# Altium PCB Hat_Board_PCB.PcbDoc (part 1 of 2)
Units mm, origin at the board's own origin, x right, y up, seen from the top; angles counter-clockwise.
Board outline 64 x 85 mm, 4 copper layers (Top Side, Ground Plane, Power Plane, Bottom Side), stack 0.844 mm thick; 133 components, 86 nets, 419 pads, 122 vias.
Unrouted connection lines stored in the file: 4.
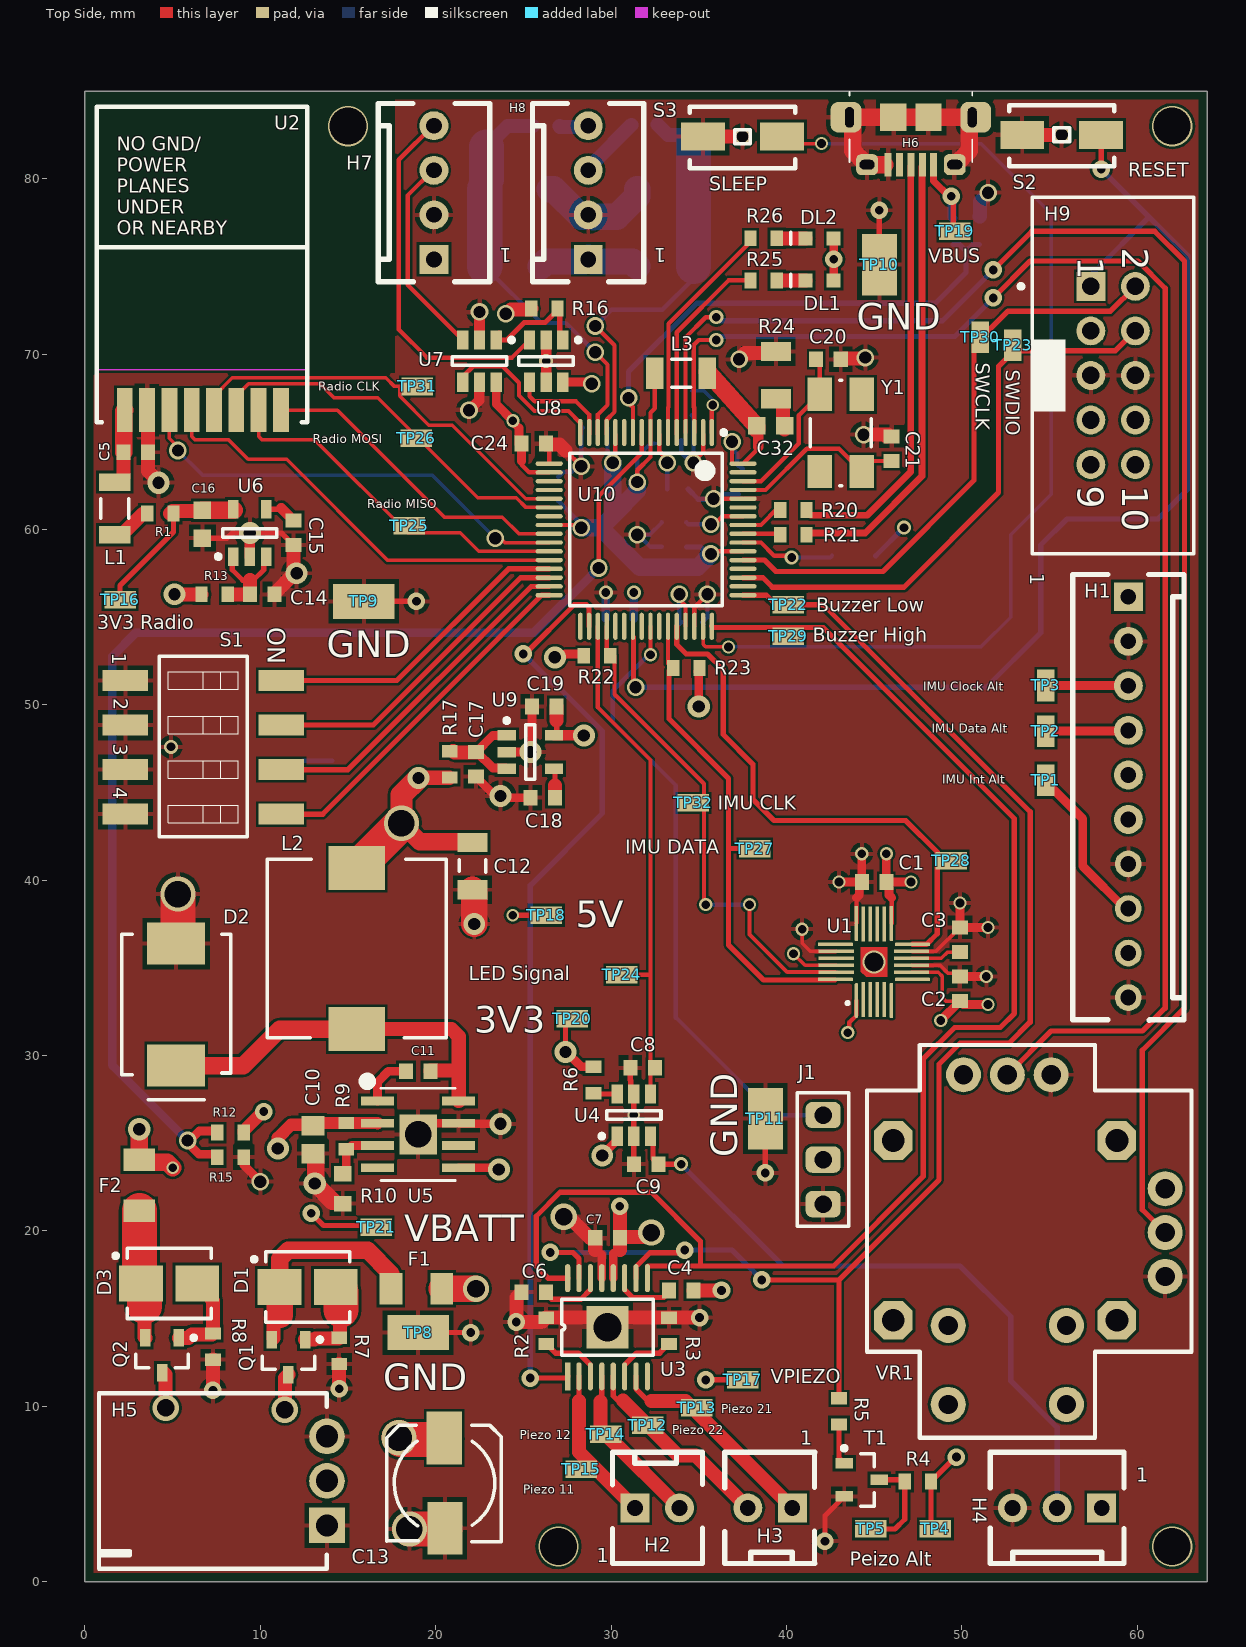
[diagram p0: Top Side view]
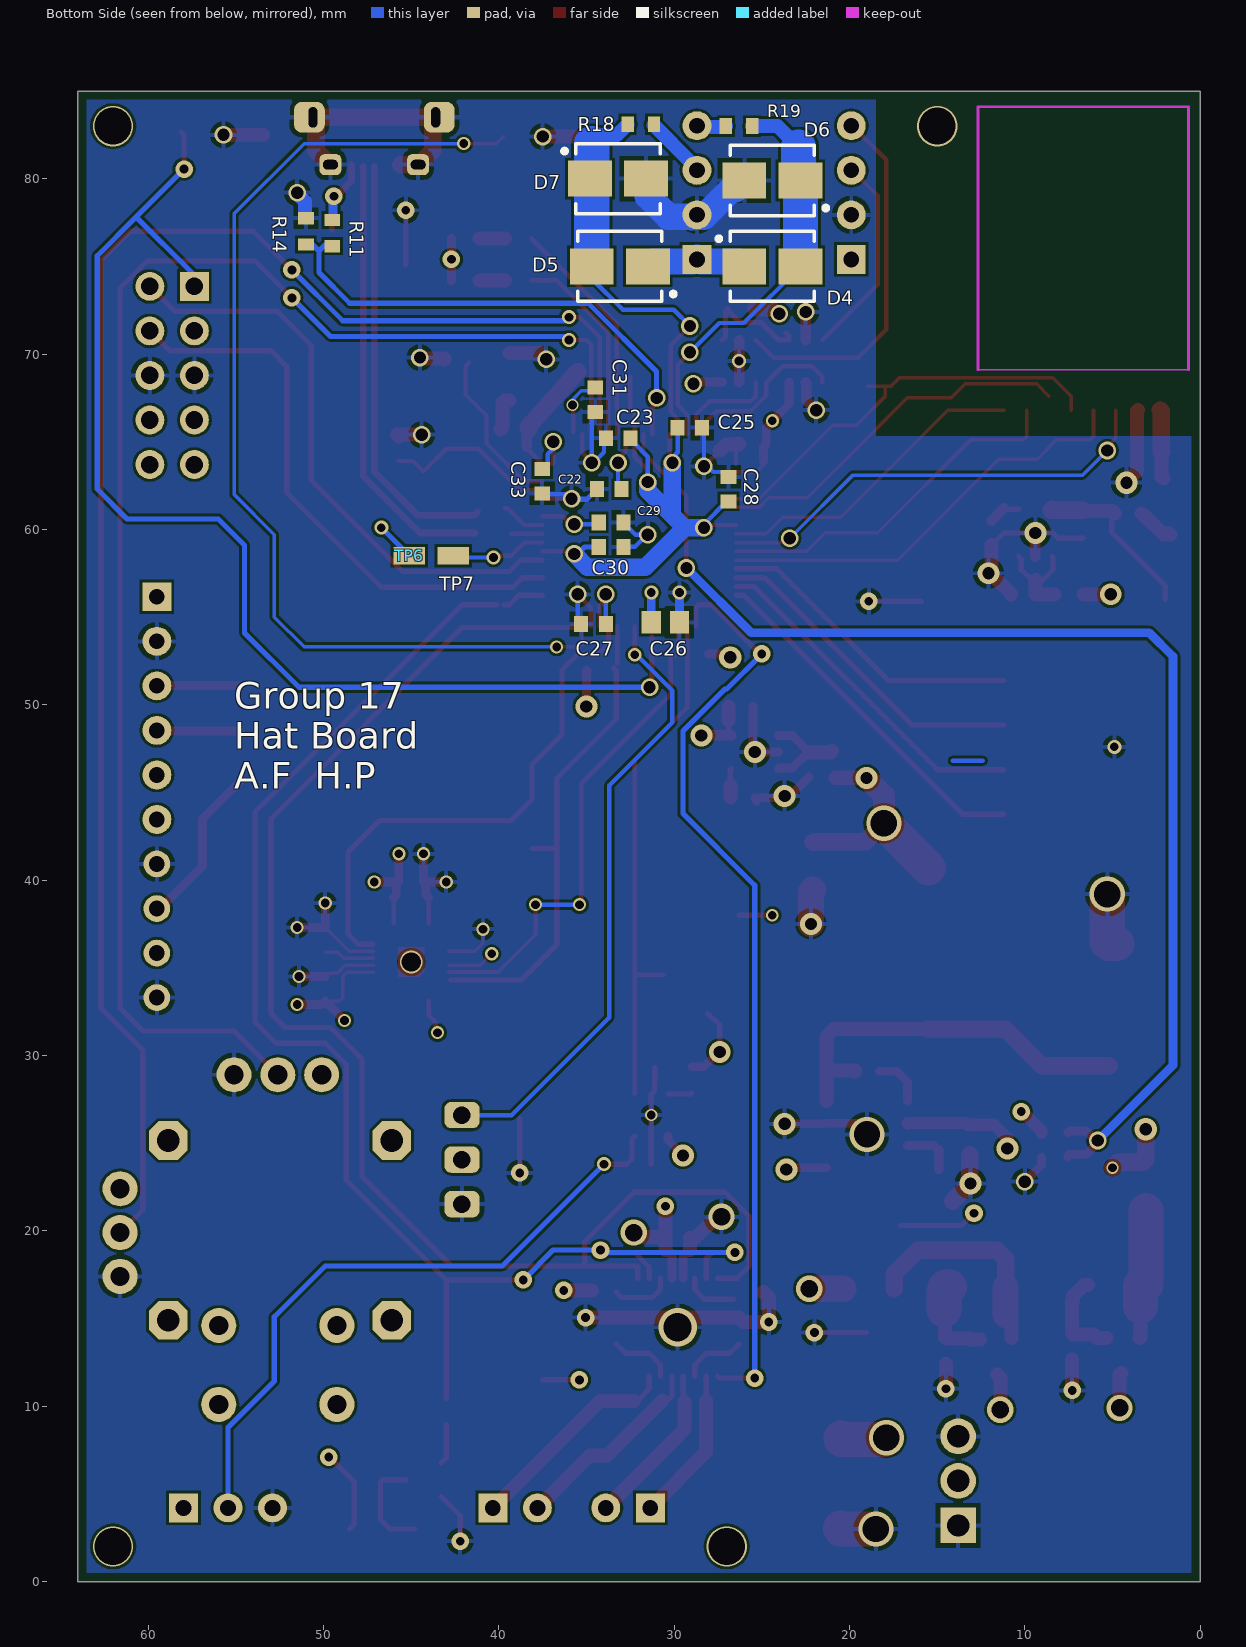
[diagram p1: Bottom Side view, seen from below]
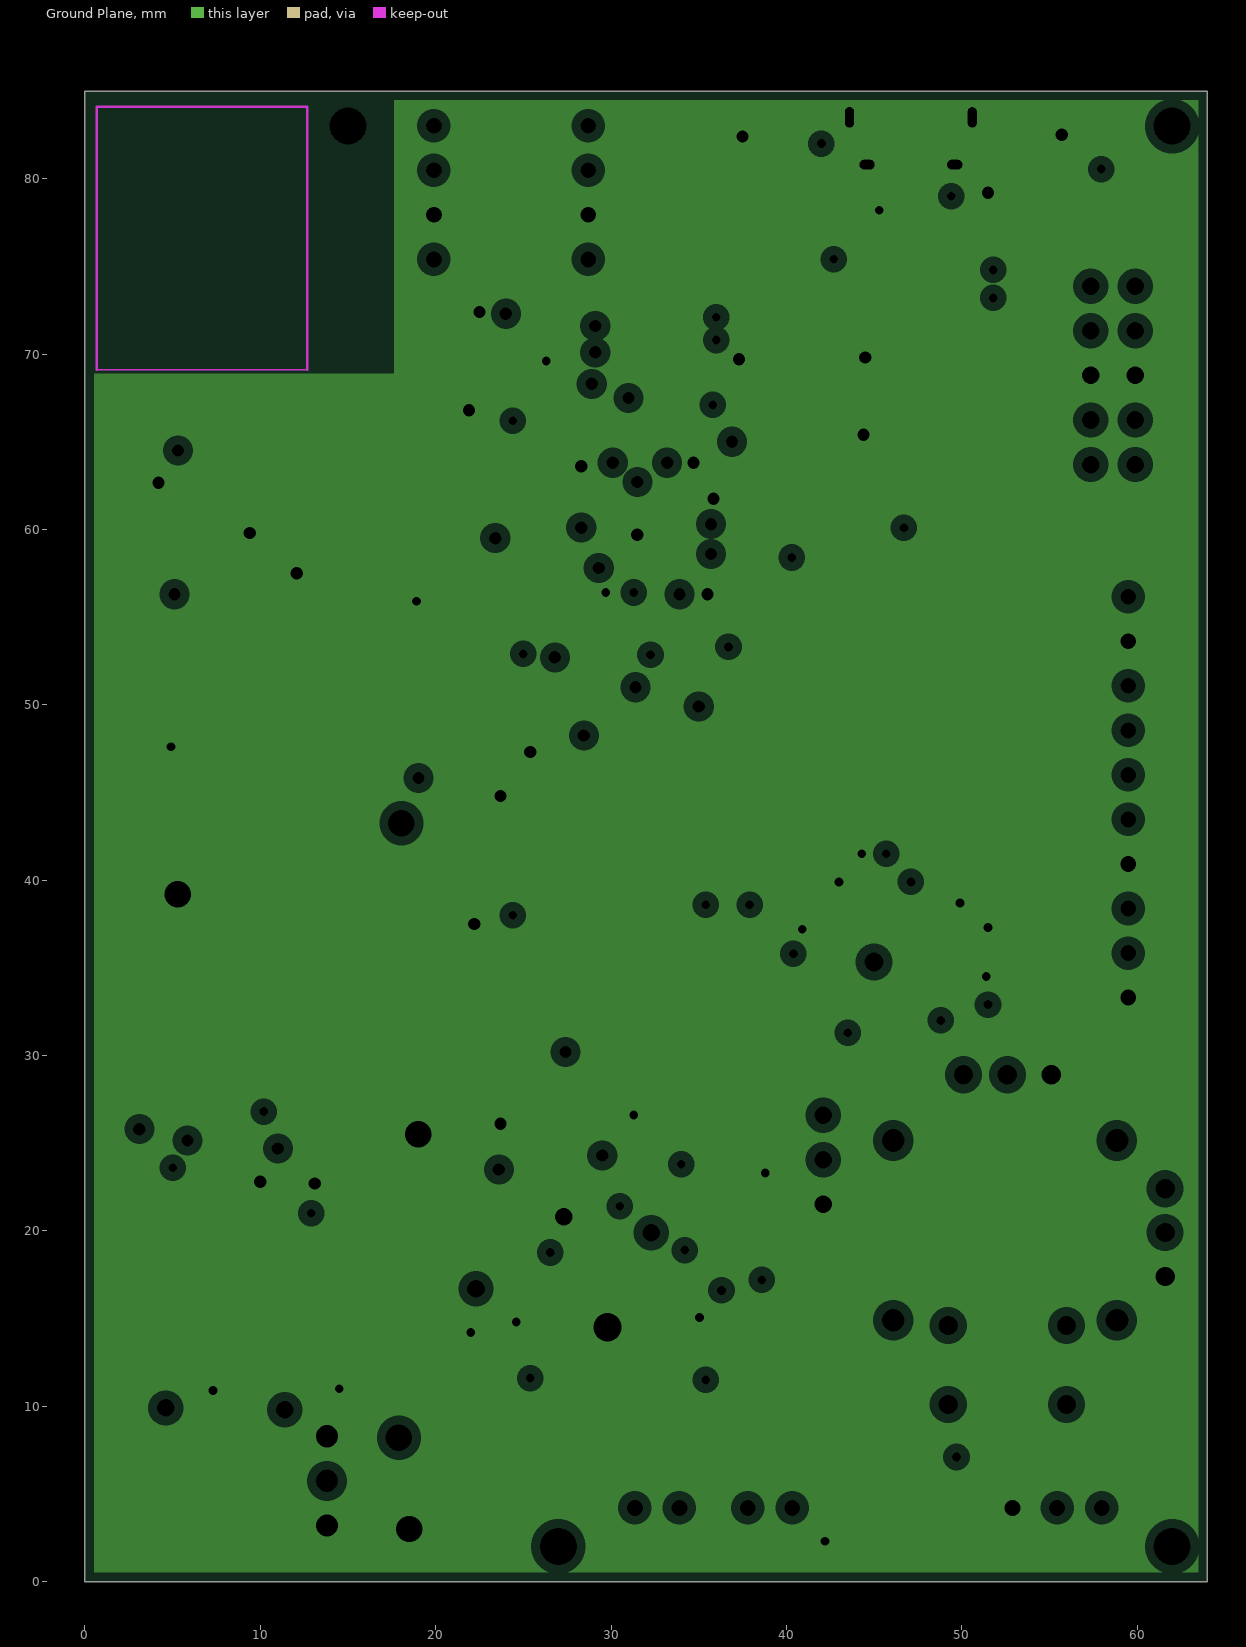
[diagram p2: Ground Plane, clearances drawn from the general rule]
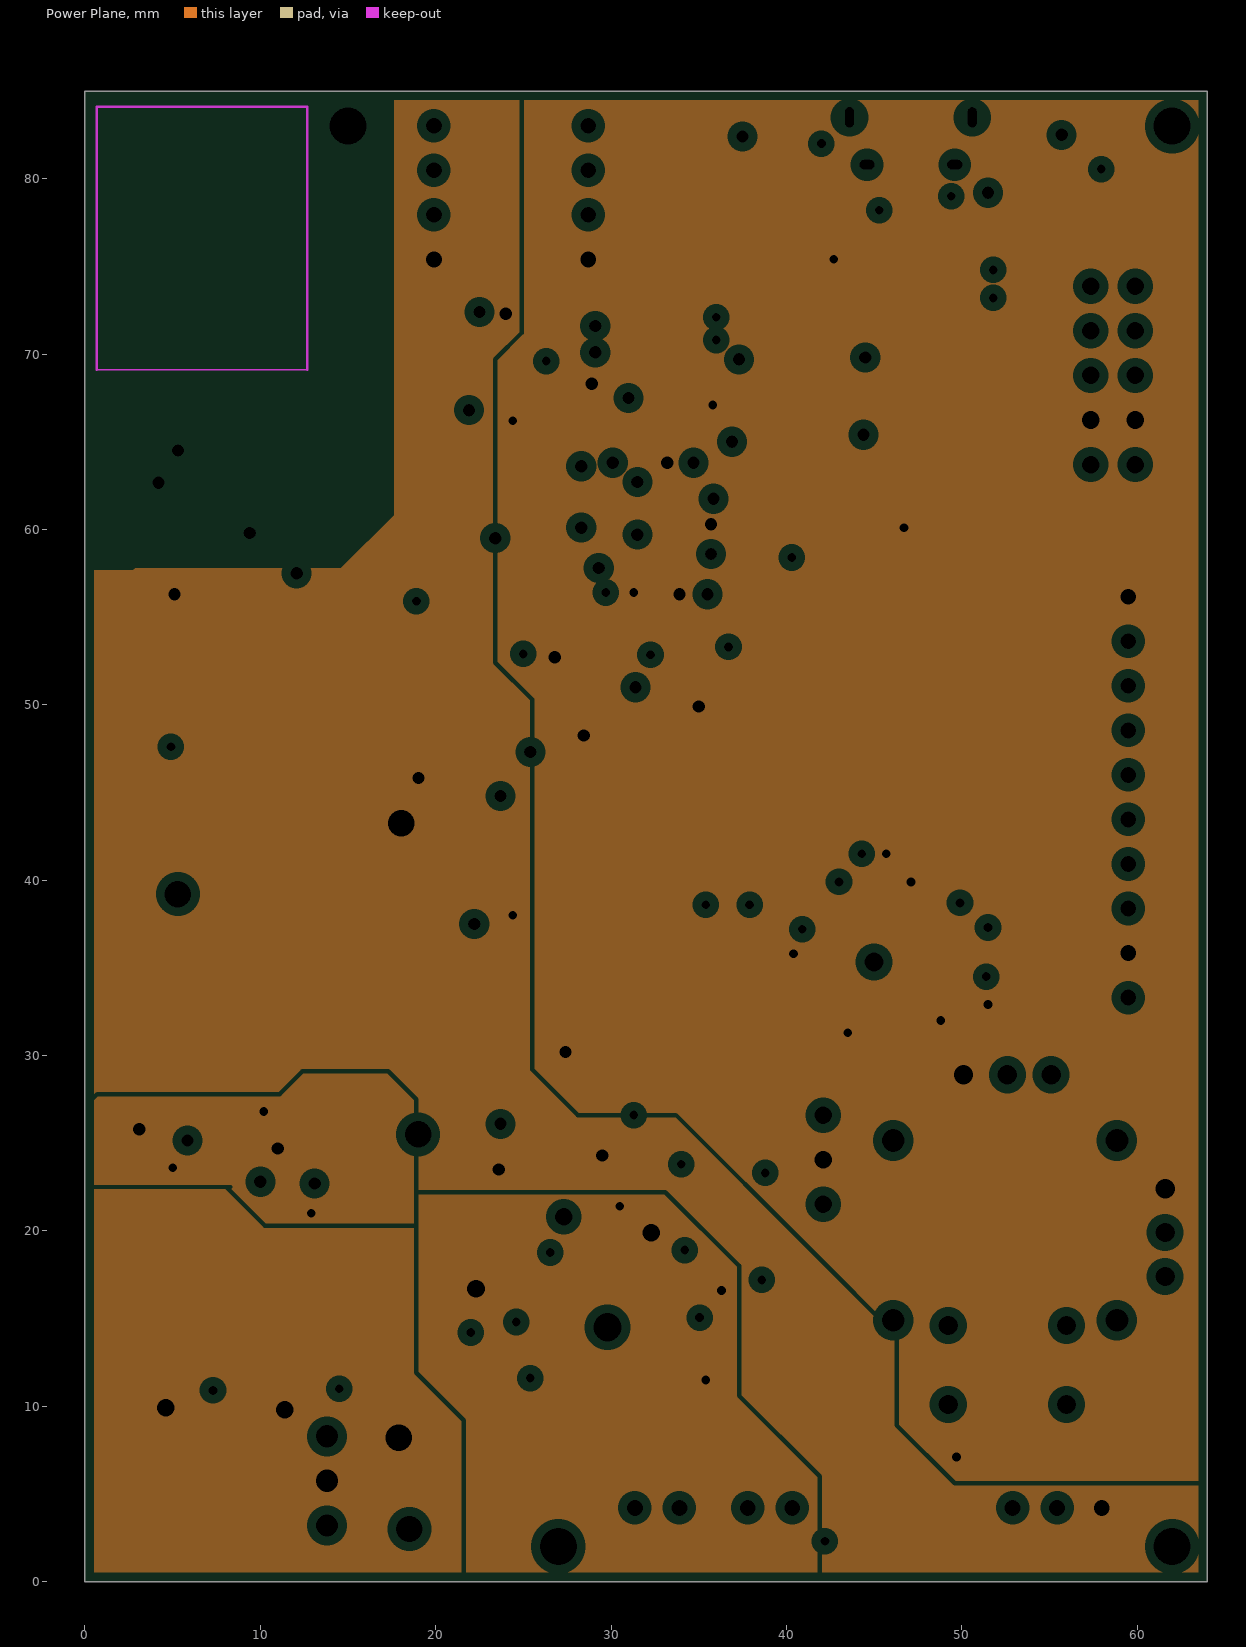
[diagram p3: Power Plane, clearances drawn from the general rule]

## Layer stack, top to bottom
Top Solder: solder mask 0.0102, Solder Resist, Dk 3.5
Top Side: signal copper 0.0356
Dielectric 1: core 0.32, FR-4, Dk 4.8
Ground Plane: plane copper 0.036, net GND
Dielectric 3: prepreg 0.127, Dk 4.2
Power Plane: plane copper 0.036, net (Multiple Nets)
Dielectric 4: core 0.254, Dk 4.2
Bottom Side: signal copper 0.0356
Bottom Solder: solder mask 0.0102, Solder Resist, Dk 3.5

## Board outline
0,85 64,85 64,0 0,0 0,85

## Design rules (kind name [scope] priority, off if disabled: settings)
BoardOutlineClearance [All] p1: gap=0.5 ignorepadtopadclearanceinfootprint=FALSE
Clearance Min_Clearance_Circuit_Labs [All] p1: gap=0.15 ignorepadtopadclearanceinfootprint=FALSE except(0: Arc-Hole Track-Hole SMDPad-Hole THPad-Hole Via-Hole Fill-Hole Poly-Hole Region-Hole Text-Hole)
DiffPairsRouting [All] p1: maxlimit=0.254 minlimit=0.254 mostfreqgap=0.254 toplayer_minwidth=0.381 toplayer_maxwidth=0.381 toplayer_prefwidth=0.381 bottomlayer_minwidth=0.381 bottomlayer_maxwidth=0.381 bottomlayer_prefwidth=0.381 maxuncoupledlength=12.7
FanoutControl Fanout_BGA [IsBGA] p1 off: bgadir=Out bgaviamode=Centered fanoutstyle=Auto fanoutdirection=Alternating viagrid=0.025 // Fanout_BGA (Default Rule)
HoleSize [All] p1: absolutevalues=TRUE maxlimit=10 minlimit=0.3 maxpercent=80.000 minpercent=20.000
MinimumAnnularRing [All] p1: minimumring=0.1
MinimumSolderMaskSliver [All] p1: minsoldermaskwidth=0.25
NetAntennae [All] p1: netantennaetolerance=1
PasteMaskExpansion [All] p1 off: expansion=0.2
PlaneClearance [All] p1: clearance=0.508
PlaneConnect [All] p1: planeconnectstyle=Relief reliefexpansion=0.508 reliefentries=4 reliefconductorwidth=0.254 reliefairgap=0.254
PolygonConnect [All] p1: connectstyle=Relief reliefconductorwidth=0.254 reliefentries=4 polygonreliefangle="90 Angle" airgapwidth=0.254
RoutingVias [All] p1: holewidth=0.5 width=1 viastyle="Through Hole" minholewidth=0.3 minwidth=0.6 maxholewidth=1 maxwidth=2
SMDNeckDown [All] p1 off: percent=50.000
SMDToCorner [All] p1: distance=98425
SMDToPlane [All] p1: distance=1968504
SilkToSolderMaskClearance SilkscreenOverComponentPads [IsPad] p1: minsilkscreentomaskgap=0.254 clearancetoexposedcopper=TRUE
SolderMaskExpansion [All] p1: expansion=0.102
ViasUnderSMD [All] p1: allowed=FALSE
Width [All] p1: maxlimit=2 minlimit=0.15 preferedwidth=0.3
21 further rules are at their usual default settings.

## Classes and differential pairs
component class SAM4S_Piezo_LED: "Buzzer PWM" C20 C21 C22 C23 C24 C25 C26 C27 C28 C29 C30 C31 C32 C33 DL1 DL2 H9 L3 R20 R21 R22 R23 R24 R25 R26 S2 S3 TP6 TP7 TP8 TP9 TP10 TP11 TP12 TP13 TP14 TP15 TP16 TP17 TP18 TP19 TP20 TP21 TP22 TP23 TP24 TP25 TP26 TP27 TP28 TP29 TP30 TP31 TP32 U10 Y1
component class Power_USB: C10 C11 C12 C13 C14 C15 C16 C17 C18 C19 D1 D2 D3 D4 D5 D6 D7 F1 F2 H5 H6 H7 H8 L2 Q1 Q2 R7 R8 R9 R10 R11 R12 R13 R14 R15 R16 R17 R18 R19 U5 U6 U7 U8 U9
component class IMU_Radio: C1 C2 C3 C4 C5 C6 C7 C8 C9 H1 H2 H3 H4 J1 L1 R1 R2 R3 R4 R5 R6 S1 T1 TP1 TP2 TP3 TP4 TP5 U1 U2 U3 U4 VR1
differential pair D: +D_P -D_N

## Components (designator, comment, footprint, x,y, rotation, side; value= is the part's Value field where it differs from the comment)
C1 "100nF" CAPC1608L 45,39.9 r0 top
C2 "10nF" CAPC1608L 49.9,33.8 r270 top
C3 "100nF" CAPC1608L 49.9,36.6 r270 top
C4 "10nF" CAPC1608L 34,16.6 r0 top
C5 "10uF" CAPC1608L 2.9,64.4 r180 top
C6 "2.2uF" CAPC1608L 25.6,16.5 r180 top
C7 "10uF" CAPC1608L 29.8,19.6 r0 top
C8 "10nF" CAPC1608L 31.8,29.3 r0 top
C9 "10nF" CAPC1608L 32,23.8 r0 top
C10 "10uF" CAPC2012L 13,25.2 r90 top
C11 "100nF" CAPC1608L 19,29.1 r0 top
C12 "47uF" CAPC3216L 22.1,40.8 r90 top
C13 "100uF/16V" NICH-1 20.5,5.6 r90 top
C14 "1uF" CAPC1608L 10.1,56.3 r180 top
C15 "10nF" CAPC1608L 11.9,59.8 r90 top
C16 "4.7uF" CAPC1608N 6.7,60.3 r90 top
C17 "1uF" CAPC1608L 22.3,46.6 r90 top
C18 "10nF" CAPC1608L 26.1,44.7 r0 top
C19 "2.2uF" CAPC1608L 26.2,49.9 r0 top
C20 "27pF" CAPC1608L 42.4,69.7 r180 top
C21 "27pF" CAPC1608L 46,64.6 r270 top
C22 "100nF" CAPC1608L 33.7,62.3 r180 bottom
C23 "100nF" CAPC1608L 33.2,65.2 r0 bottom
C24 "100nF" CAPC1608L 25.6,64.9 r180 top
C25 "100nF" CAPC1608L 29.1,65.8 r180 bottom
C26 "10uF" CAPC2012L 30.5,54.7 r0 bottom
C27 "100nF" CAPC1608L 34.6,54.6 r180 bottom
C28 "100nF" CAPC1608L 26.9,62.3 r90 bottom
C29 "100nF" CAPC1608L 33.6,60.4 r0 bottom
C30 "100nF" CAPC1608L 33.6,59 r180 bottom
C31 "100nF" CAPC1608L 34.5,67.4 r90 bottom
C32 "4.7uF" CAPC1608N 39.1,65.9 r180 top
C33 "100nF" CAPC1608L 37.525,62.75 r90 bottom
D1 "DIODE ZENER 5.6V" DO-214AA_SCL 12.7,16.8 r0 top
D2 "SCHOTTKY 30V 4A" SMC 5.2,32.9 r270 top
D3 "DIODE ZENER 5.6V" DO-214AA_SCL 4.8,17 r0 top
D4 "DIODE ZENER 5.6V" DO-214AA_SCL 24.4,75 r180 bottom
D5 "DIODE ZENER 5.6V" DO-214AA_SCL 33.1,75 r0 bottom
D6 "DIODE ZENER 5.6V" DO-214AA_SCL 24.4,79.9 r0 bottom
D7 "DIODE ZENER 5.6V" DO-214AA_SCL 33.2,80 r180 bottom
DL1 "Blue" WL-SMCW0603 41.1,74.2 r0 top
DL2 "Dark Green" WL-SMCW0603 41.1,76.6 r0 top
F1 "5A" RESC3216N 18.9,16.7 r0 top
F2 "2A" RESC3216N 3.1,22.6 r90 top
H1 "10 Pin Molex KK Hdr" MOLEX_KK_10_HDR 59.5,56.16 r270 top
H2 "2 Pin Molex KK HDR" MOLEX_KK_2_HDR 31.36,4.2 r0 top
H3 "2 Pin Molex KK HDR" MOLEX_KK_2_HDR 40.34,4.2 r180 top
H4 "3 Pin Molex KK Hdr" MOLEX_KK_3_HDR 57.98,4.2 r180 top
H5 "Battery_HEADER_3pin" BATT_HEADER_3POS 13.8,5.74 r90 top
H6 "JS_USB_MICRO_B" FCI_USB_10118194-0001LF 47.1,84.95 r180 top
H7 "4 Pin Molex KK Hdr" MOLEX_KK_4_HDR 19.9,75.4 r90 top
H8 "4 Pin Molex KK Hdr" MOLEX_KK_4_HDR 28.7,75.4 r90 top
H9 "Header 5X2 Vert" IDC2.54-V10D 58.63,68.78 r270 top
J1 "100Mil Jumper" JMP2.54-CO 42.1,26.6 r270 top
L1 "1A max, Idc 0.3R," INDC3216L 1.7,61.2 r270 top
L2 "IND 5.2UH 6A" INDUCTOR5u2 15.5,36.1 r90 top
L3 "1A max, Idc 0.3R," INDC3216L 34,68.9 r180 top
Q1 "SSM3J328R,LF" SOT23_L 11.6,12.8 r270 top
Q2 "SSM3J328R,LF" SOT23_L 4.4,12.9 r270 top
R1 "0R" RESC1608L 4.3,60.9 r180 top
R2 "0R" RESC1608L 26.3,14.3 r90 top
R3 "0R" RESC1608L 33.3,14.3 r90 top
R4 "1K" RESC1608L 47.5,5.7 r0 top
R5 "0R" RESC1608L 43,9.7 r270 top
R6 "0R" RESC1608L 29,28.6 r90 top
R7 "270R" RESC1608L 14.5,13.15 r90 top
R8 "270R" RESC1608L 7.3,13.4 r90 top
R9 "15K" RESC1608L 14.9,25.4 r90 top
R10 "47K" RESC1608N 14.7,22.4 r90 top
R11 "27K" RESC1608L 49.5,76.9 r90 bottom
R12 "36K" RESC1608L 8.3,25.6 r0 top
R13 "0R" RESC1608L 7.4,56.3 r0 top
R14 "47K" RESC1608L 51,77 r270 bottom
R15 "24K" RESC1608L 8.3,24.2 r180 top
R16 "0R" RESC1608L 26.2,72.6 r180 top
R17 "0R" RESC1608L 20.8,46.6 r90 top
R18 "10K" RESC1608L 31.9,83.1 r180 bottom
R19 "10K" RESC1608L 26.3,83 r0 bottom
R20 "27R" RESC1608L 40.4,61.1 r180 top
R21 "27R" RESC1608L 40.4,59.7 r180 top
R22 "2K" RESC1608L 29.2,52.8 r180 top
R23 "2K" RESC1608L 34.3,52.1 r0 top
R24 "1R" RESC3216L 39.4,68.8 r270 top
R25 "360R" RESC1608L 38.7,74.2 r180 top
R26 "360R" RESC1608L 38.7,76.6 r180 top
S1 "WS_SW DIP-4" "DIP_SW_4WAY_SMD -" 2.3,51.38 r270 top
S2 "RESET" EVQPNF05M 55.7,82.5 r180 top
S3 "SLEEP" EVQPNF05M 37.5,82.4 r180 top
T1 "BSH105,215" SOT23_L 44.3,5.8 r0 top
TP1 "IMU Int Alt" TP_0603 54.8,45.7 r90 top
TP2 "IMU Data Alt" TP_0603 54.8,48.5 r90 top
TP3 "IMU Clock Alt" TP_0603 54.8,51.1 r90 top
TP4 "Piezo Alt" TP_0603 48.5,3 r0 top
TP5 "Peizo Alt" TP_0603 44.8,3 r0 top
TP6 "TP_0603" TP_0603 45.1,58.5 r180 bottom
TP7 "Erase" TP_0603 42.6,58.5 r180 bottom
TP8 "GND" TP_1206 19,14.2 r0 top value=TP
TP9 "GND" TP_1206 15.9,55.9 r0 top value=TP
TP10 "GND" TP_1206 45.3,75.1 r90 top value=TP
TP11 "GND" TP_1206 38.8,26.4 r90 top value=TP
TP12 "Piezo 22" TP_0603 32.1,8.9 r180 top
TP13 "Piezo 21" TP_0603 34.9,9.9 r180 top
TP14 "Piezo 12" TP_0603 29.7,8.4 r180 top
TP15 "Piezo 11" TP_0603 28.3,6.4 r180 top
TP16 "3V3 Radio" TP_0603 2,56 r0 top
TP17 "VPIEZO" TP_0603 37.5,11.5 r180 top
TP18 "5V" TP_0603 26.3,38 r0 top
TP19 "VBUS" TP_0603 49.6,77 r0 top
TP20 "3V3" TP_0603 27.8,32.1 r180 top
TP21 "VBATT" TP_0603 16.6,20.2 r180 top
TP22 "Buzzer Low" TP_0603 40.1,55.7 r180 top
TP23 "SWDIO" TP_0603 52.9,70.5 r270 top
TP24 "LED Signal" TP_0603 30.6,34.6 r180 top
TP25 "Radio MISO" TP_0603 18.5,60.2 r180 top
TP26 "Radio MOSI" TP_0603 18.9,65.2 r180 top
TP27 "IMU DATA" TP_0603 38.2,41.8 r180 top
TP28 "IMU INT" TP_0603 49.4,41.1 r180 top
TP29 "Buzzer High" TP_0603 40.1,53.9 r180 top
TP30 "SWCLK" TP_0603 51.05,70.95 r270 top
TP31 "Radio CLK" TP_0603 18.95,68.15 r0 top
TP32 "IMU CLK" TP_0603 34.7,44.4 r180 top
U1 "Comment" QUAD24 43.993,33.985 r90 top locked
U2 "nRF24 SMD" NRF24 0.671,66.1 r0 top
U3 "DRV8833" HTSOP16 27.525,11.7 r90 top
U4 "SN74LVC1T45" SOT23-6_N 31.3,26.6 r90 top
U5 "Comment" RD_8_1 19,25.5 r0 top locked value=Value
U6 "CAT6219-330TDGT3" SOT95P280X145-5N 9.4,59.8 r90 top
U7 "SN74LVC1T45" SOT23-6_N 22.5,69.6 r270 top
U8 "SN74LVC1T45" SOT23-6_N 26.3,69.6 r270 top
U9 "CAT6219-330TDGT3" SOT95P280X145-5N 25.4,47.3 r0 top
U10 "Comment" LQFP64_L 32,60 r270 top locked
VR1 "Joystick 10k with Sw" Joystick_Sw 52.6,28.9 r90 top
Y1 "12MHz" 6.0X3.5-4 43.1,65.5 r90 top

## Footprints (in the part's own frame and the unit in brackets; to place one, negate y for a bottom-side part, rotate by r counter-clockwise, add the part's x,y. Pads: shape width x height; smd on the part's side, far side on the other; paste and mask are expansions set on the pad)
6.0X3.5-4 [mm] "4 SMD 6.0X3.5 mm No Lead Crystal"
  rect 1.9x1.4 smd: 1(-2.2,-1.2) 2(2.2,-1.2) 3(2.2,1.2) 4(-2.2,1.2)
  silkscreen extent -3,-1.75 3,1.75, body extent -3,-1.75 3,1.75, height 1.2
BATT_HEADER_3POS [mil]
  rect 80x80 hole 50: 1(-100,0)
  round 80 hole 50: 2(0,0) 3(100,0)
  silkscreen extent -197,0 197,512
CAPC1608L [mm] "Chip Capacitor, Body 1.6x0.8mm, IPC High Density"
  rect 0.8x0.9 smd: 1(-0.7,0) 2(0.7,0)
  body extent -0.87,-0.48 0.87,0.48, height 0.85
CAPC1608N [mm] "Chip Capacitor, Body 1.6x0.8mm, IPC Medium Density"
  rect 1x1 smd: 1(-0.8,0) 2(0.8,0)
  body extent -0.87,-0.48 0.87,0.48, height 0.85
CAPC2012L [mm] "Chip Capacitor, Body 2.0x1.3mm, IPC High Density"
  rect 1.1x1.3 smd: 1(-0.8,0) 2(0.8,0)
  body extent -1.1,-0.72 1.1,0.72, height 1.1
CAPC3216L [mm] "Chip Capacitor, Body 3.2x1.6mm, IPC High Density"
  rect 1.1x1.7 smd: 1(-1.35,0) 2(1.35,0)
  silkscreen extent -0.35,-0.75 0.35,0.75, body extent -1.7,-0.9 1.7,0.9, height 1.35
"DIP_SW_4WAY_SMD -" [mm] "DIP Switch; 8 Leads"
  rect 1.2x2.6 smd: 1(0,0) 2(2.54,0) 3(5.08,0) 4(7.62,0) 5(7.62,8.89) 6(5.08,8.9) 7(2.54,8.9) 8(0,8.9)
  silkscreen extent -1.4,1.95 8.9,6.95
DO-214AA_SCL [mm] "Molded Diode, 2-Leads, Body 4.40x3.62mm, IPC Medium Density"
  rect 2.5x2.05 smd: 1(-1.6,0) 2(1.6,0)
  silkscreen extent -3.17,-2 2.4,2
EVQPNF05M [mm] "Panansonic light touch SMD push button switch"
  rect 2.5x1.6 smd: 1(-2.25,0) 2(2.25,0)
  silkscreen extent -3,-1.7 3,1.8, body extent -3,-1.7 3,1.8, height 5
FCI_USB_10118194-0001LF [mm] "Micro USB B Type Receptacle"
  rect 0.4x1.35 smd mask+0.07: 1(-1.3,4.15) 2(-0.65,4.15) 3(0,4.15) 4(0.65,4.15) 5(1.3,4.15)
  rrect50% 1.75x1.75 hole 0.5 slot 1.15 at 90 deg copper offset -0.2,0 paste+0 mask+0.1: 6(-3.5,1.45)
  rrect50% 1.25x1.2 hole 0.55 slot 0.85 at 0 deg: 6(-2.5,4.15) 6(2.5,4.15)
  rect 1.5x1.55 smd: 6(-1,1.45) 6(1,1.45)
  rrect50% 1.75x1.75 hole 0.5 slot 1.15 at 90 deg copper offset 0.2,0 paste+0 mask+0.1: 6(3.5,1.45)
  silkscreen extent -3.5,0 3.5,4
HTSOP16 [mm]
  rect 1.6x0.3 smd: 1(0,0)
  oval 1.6x0.3 smd: 2(0,-0.65) 3(0,-1.3) 4(0,-1.95) 5(0,-2.6) 6(0,-3.25) 7(0,-3.9) 8(0,-4.55) 9(5.6,-4.55) 10(5.6,-3.9) 11(5.6,-3.25) 12(5.6,-2.6) 13(5.6,-1.95) 14(5.6,-1.3) 15(5.6,-0.65) 16(5.6,0)
  rect 2.4x2.4 smd: 17(2.8,-2.275)
  silkscreen extent 1.2,-4.88 4.4,0.33
IDC2.54-V10D [mm] "Connector; IDC, Low Profile Male Header, Thru-Hole; 10 Position; Vertical; Pitch 2.54 mm; Body 20.32 x 9.2 x 9.45 mm (LxWxH)"
  rect 1.65x1.65 hole 1: 1(-5.08,-1.27)
  round 1.65 hole 1: 2(-5.08,1.27) 3(-2.54,-1.27) 4(-2.54,1.27) 5(0,-1.27) 6(0,1.27) 7(2.54,-1.27) 8(2.54,1.27) 9(5.08,-1.27) 10(5.08,1.27)
  silkscreen extent -10.16,-5.37 10.16,4.6, body extent -10.16,-4.6 10.16,4.6, height 9.45
INDC3216L [mm] "Chip Inductor, Body 3.2x1.6mm, IPC High Density"
  rect 1x1.8 smd: 1(-1.5,0) 2(1.5,0)
  silkscreen extent -0.55,-0.8 0.55,0.8, body extent -1.75,-0.95 1.75,0.95, height 1.9
INDUCTOR5u2 [mm]
  rect 2.5x3.2 smd: 1(-4.6,0) 2(4.6,0)
  silkscreen extent -5.1,-5.1 5.1,5.1
JMP2.54-CO [mm] "Jumper Change over 2.54mm"
  rrect50% 1.5x2 hole 1: 1(0,0) 2(2.54,0) 3(5.08,0)
  silkscreen extent -1.27,-1.47 6.35,1.47, body extent -1.27,-1.43 6.36,1.43, height 8.45
Joystick_Sw [mm]
  round 2 hole 1.1: 1(0,2.5) 2(0,0) 3(0,-2.5) 4(-6.5,-9) 5(-9,-9) 6(-11.5,-9) 7(-14.3,-3.37) 8(-18.8,-3.37) 9(-18.8,3.37) 10(-14.3,3.37)
  oct 2.2x2.2 hole 1.3: 11(-14,-6.25) 12(-3.75,-6.25) 13(-14,6.5) 14(-3.75,6.5)
  silkscreen extent -20.7,-10.5 1.7,8
LQFP64_L [mm] "Thin QFP, 64-Leads, Body 10x10mm, Pitch 0.5mm, IPC High Density"
  oval 1.55x0.25 smd mask+0.07: 1(-5.525,3.75) 2(-5.525,3.25) 3(-5.525,2.75) 4(-5.525,2.25) 5(-5.525,1.75) 6(-5.525,1.25) 7(-5.525,0.75) 8(-5.525,0.25) 9(-5.525,-0.25) 10(-5.525,-0.75) 11(-5.525,-1.25) 12(-5.525,-1.75) 13(-5.525,-2.25) 14(-5.525,-2.75) 15(-5.525,-3.25) 16(-5.525,-3.75) 33(5.525,-3.75) 34(5.525,-3.25) 35(5.525,-2.75) 36(5.525,-2.25) 37(5.525,-1.75) 38(5.525,-1.25) 39(5.525,-0.75) 40(5.525,-0.25) 41(5.525,0.25) 42(5.525,0.75) 43(5.525,1.25) 44(5.525,1.75) 45(5.525,2.25) 46(5.525,2.75) 47(5.525,3.25) 48(5.525,3.75)
  oval 0.25x1.55 smd mask+0.07: 17(-3.75,-5.525) 18(-3.25,-5.525) 19(-2.75,-5.525) 20(-2.25,-5.525) 21(-1.75,-5.525) 22(-1.25,-5.525) 23(-0.75,-5.525) 24(-0.25,-5.525) 25(0.25,-5.525) 26(0.75,-5.525) 27(1.25,-5.525) 28(1.75,-5.525) 29(2.25,-5.525) 30(2.75,-5.525) 31(3.25,-5.525) 32(3.75,-5.525) 49(3.75,5.525) 50(3.25,5.525) 51(2.75,5.525) 52(2.25,5.525) 53(1.75,5.525) 54(1.25,5.525) 55(0.75,5.525) 56(0.25,5.525) 57(-0.25,5.525) 58(-0.75,5.525) 59(-1.25,5.525) 60(-1.75,5.525) 61(-2.25,5.525) 62(-2.75,5.525) 63(-3.25,5.525) 64(-3.75,5.525)
  silkscreen extent -5.65,-4.35 4.35,4.55, body extent -5,-5 5,5, height 1.6
MOLEX_KK_2_HDR [mil] "MOLEX_KK_2_HDR"
  rect 65x65 hole 35.43: 1(0,0)
  round 65 hole 35.43: 2(100,0)
  silkscreen extent -50,-125 152,125, body extent -44,-121 146,119, height 630
MOLEX_KK_3_HDR [mil] "MOLEX_KK_3_HDR"
  rect 65x65 hole 35.43: 1(0,0)
  round 65 hole 35.43: 2(100,0) 3(200,0)
  silkscreen extent -50,-125 250,125, body extent -44,-120 244,119, height 630
MOLEX_KK_4_HDR [mil] "MOLEX_KK_4_HDR"
  rect 65x65 hole 35.43: 1(0,0)
  round 65 hole 35.43: 2(100,0) 3(200,0) 4(300,0)
  silkscreen extent -50,-125 350,125, body extent -44,-119 343,119, height 630
MOLEX_KK_10_HDR [mil] "MOLEX_KK_10_HDR"
  rect 65x65 hole 35.43: 1(0,0)
  round 65 hole 35.43: 2(100,0) 3(200,0) 4(300,0) 5(400,0) 6(500,0)
  round 60 hole 35.43: 7(600,0) 8(700,0) 9(800,0) 10(900,0)
  silkscreen extent -50,-125 951,125, body extent -44,-120 944,120, height 630
NICH-1 [mm] "Electrolytic capacitor"
  rect 3x2 smd: 1(-2.561,-0.022) 2(2.584,0.011)
  silkscreen extent -3.34,-3.25 3.3,3.3, body extent -3.2,-3.2 3.2,3.2, height 5.3
NRF24 [mm]
  rect 0.9x2.5 smd: 1(1.6,0.7) 2(2.871,0.7) 3(4.143,0.7) 4(5.414,0.7) 5(6.686,0.7) 6(7.957,0.7) 7(9.229,0.7) 8(10.5,0.7)
  Keep-Out Layer lines w0.1: 0,3 12,3
  Keep-Out Layer lines w0.15: 0,3 0,18 12,18 12,3
  silkscreen extent 0,0 12,18
QUAD24 [mm]
  oval 2x0.2 smd paste+0.02 mask+0.015: 1(-0.85,0)
  rect 2x0.2 smd paste+0.02 mask+0.015: 2(-0.8,-0.4) 3(-0.8,-0.8) 4(-0.8,-1.2) 5(-0.8,-1.6) 14(3.5,-1.6) 15(3.5,-1.2) 16(3.5,-0.8) 17(3.5,-0.4)
  rrect50% 2x0.2 smd paste+0.02 mask+0.015: 6(-0.85,-2) 13(3.55,-2) 18(3.55,0)
  rrect50% 0.2x2 smd paste+0.02 mask+0.015: 7(0.35,-3.2) 12(2.35,-3.2) 19(2.35,1.2) 24(0.35,1.2)
  rect 0.2x2 smd paste+0.02 mask+0.015: 8(0.75,-3.15) 9(1.15,-3.15) 10(1.55,-3.15) 11(1.95,-3.15) 20(1.95,1.15) 21(1.55,1.15) 22(1.15,1.15) 23(0.75,1.15)
  Top Side region: 0.5,-1.75 0.5,-0.55 0.8,-0.25 2.2,-0.25 2.2,-1.75
  silkscreen extent -1.05,0.45 -0.95,0.55
RD_8_1 [mil]
  rect 74x20 smd paste+0 mask+0: 1(-91,75) 2(-91,25) 3(-91,-25) 4(-91,-75) 5(91,-75) 6(91,-25) 7(91,25) 8(91,75)
  rect 84.65x90 smd paste-44.5 mask+0: EPAD(0,0)
  silkscreen extent -118,-104 84,123, body extent 0,0 10,10, height 10
RESC1608L [mm] "Chip Resistor, Body 1.6x0.8mm, IPC High Density"
  rect 0.7x0.9 smd: 1(-0.75,0) 2(0.75,0)
  body extent -0.85,-0.48 0.85,0.48, height 0.9
RESC1608N [mm] "Chip Resistor, Body 1.6x0.8mm, IPC Medium Density"
  rect 0.9x1 smd: 1(-0.85,0) 2(0.85,0)
  body extent -0.85,-0.48 0.85,0.48, height 0.6
RESC3216L [mm] "Chip Resistor, Body 3.1x1.6mm, IPC High Density"
  rect 1.1x1.7 smd: 1(-1.35,0) 2(1.35,0)
  body extent -1.68,-0.87 1.68,0.87, height 2.54
RESC3216N [mm] "Chip Resistor, Body 3.2x1.6mm, IPC Medium Density"
  rect 1.3x1.8 smd: 1(-1.45,0) 2(1.45,0)
  body extent -1.68,-0.87 1.68,0.87, height 0.71
SMC [mm] "DO-214-AB/SMC; 2 C-Bend Leads; Body 7.9 x 5.9 mm, inc. leads (LxW)"
  rect 2.4x3.3 smd: 1(-3.475,0) 2(3.475,0)
  silkscreen extent -4,-3.1 5.43,3.1
SOT23-6_N [mm]
  rect 1.1x0.65 smd: 1(-1.2,0.95) 2(-1.2,0) 3(-1.2,-0.95) 4(1.2,-0.95) 5(1.2,0) 6(1.2,0.95)
  silkscreen extent -1.32,-1.55 0.25,1.95, body extent -0.9,-1.55 0.9,1.55, height 1.45
SOT23_L [mm] "SOT23, 3-Leads, Body 2.9x1.3mm, Pitch 0.95mm, Lead Span 2.3mm, IPC High Density"
  rect 1x0.6 smd: 1(-1,0.95) 2(-1,-0.95) 3(1,0)
  silkscreen extent -1.12,-1.5 0.7,1.93, body extent -0.7,-1.5 0.7,1.5, height 1.1
SOT95P280X145-5N [mm] "SOT23, 5-Leads, Body 2.90x2.80mm, Pitch 0.95mm, IPC Medium Density"
  rect 1.05x0.6 smd: 1(-1.35,0.95) 2(-1.35,0) 3(-1.35,-0.95) 4(1.35,-0.95) 5(1.35,0.95)
  silkscreen extent -1.47,-1.55 0.25,1.92, body extent -0.87,-1.52 0.87,1.53, height 1.45
TP_0603 [mm] "TestPoint 0603"
  rect 1.8x1 smd: 1(0,0)
  body extent -1,-0.6 1,0.6, height 0.9
TP_1206 [mm] "Test Point Pad"
  rect 3.5x2 smd: 1(0,0)
  body extent -1.62,-0.85 1.63,0.8, height 2
WL-SMCW0603 [mm] "2.4 x 0.8 x 0.7mm LED"
  rect 0.8x0.8 smd: 1(0,0) 2(1.6,0)
  silkscreen extent -0.85,-0.35 -0.85,0.35

## Part data
C1 C3 C11 C22 C23 C24 C25 C27 C28 C29 C30 C31 C33: library part CC_100nF_0603, "CAP CER 100nF X7R +-10% 50V 0603", Code_IPC="1608 [0603]", PackageReference=0603, Storage Location="PCB Assembly WS", Supplier="ECE Dept"
C2 C4 C8 C9 C15 C18: library part CC_10nF_0603, "CAP CER 10nF X7R +-10% 50V 0603", Code_IPC="1608 [0603]", PackageReference=0603, Storage Location="PCB Assembly WS", Supplier="ECE Dept"
C5 C7: library part CC_10uF_0603, "CAP CER 10UF X5R +-20% 6V3 0603", Voltage - Rated=6.3V, Storage Location="PCB Assembly WS", Supplier="ECE Dept"
C6 C19: library part CC_2.2uF_0603, "CAP CER 2.2uF X5R +-20% 10V 0603", Max Voltage=10V, Code_IPC="1608 [0603]", PackageReference=0603, Storage Location="PCB Assembly WS", Supplier="ECE Dept"
C10 C26: library part CC_10uF_0805_10V, "CAP CER 10uF X7R +-20% 10V 0805", Max Voltage=10V, Code_IPC=2012[0805], Note="Footprint corresponds to dimensions for bulk cassette packaging. This case size has tightened tolerances.", PackageReference=0805, Storage Location="PCB Assembly WS", Supplier="ECE Dept"
C12: library part CC_47uF_1206, "CAP CER 47uF X5R -/+20% 6V 1206", Dielectric=X5R, Max Voltage=6V, MoV=6V, Storage Location="PCB Assembly WS", Supplier="ECE Dept"
C13: library part CA_100uF_16V, "CAP ALUM 100uF 16V SMD", Manufacturer=Nichcon, Manufacturer PN=UWX1C101MCL1GB, Supplier Part Number 1=1870677, Storage Location="PCB Assembly WS", Supplier="ECE Dept", Supplier 1=Farnell, Supplier 2=Digi-Key, Supplier Part Number 2=493-2105-1-ND
C14 C17: library part CC_1uF_0603, "CAP CER 1uF Y5V -20% +80% 16V 0603", Max Voltage=16V, Code_IPC="1608 [0603]", PackageReference=0603, Storage Location="PCB Assembly WS", Supplier="ECE Dept"
C16 C32: library part CC_4.7uF_0603, "CAP CER 4.7uF X5R +-20%  10V 0603", Max Voltage=10V, Code_IPC=2012[0805], Note="Footprint corresponds to dimensions for bulk cassette packaging. This case size has tightened tolerances.", PackageReference=0805, Storage Location="PCB Assembly WS", Supplier="ECE Dept"
C20 C21: library part CC_27pF_0603, "CAP CER 27pF NPO/COG +-5% 50V 0603", Code_IPC="1608 [0603]", PackageReference=0603, Storage Location="PCB Assembly WS", Supplier="ECE Dept"
D1 D3 D4 D5 D6 D7: library part SMBJ5339B-TP, "DIODE ZENER 5.6V 5W DO214AA", Base Part Number=SMBJ5339, Manufacturer="Micro Commercial Co", Operating Temperature="-55°C ~ 150°C", Package / Case="DO-214AA, SMB", Supplier Device Package="DO-214AA (SMB)", Supplier Part Number 1=SMBJ5339B-TPMSCT-ND, Tolerance=±5%, Category="Discrete Semiconductor Products", ComponentLink1Description=http://www.mccsemi.com/up_pdf/SMBJ5338B-SMBJ5388B(SMB).pdf, ComponentLink1URL=http://www.mccsemi.com/up_pdf/SMBJ5338B-SMBJ5388B(SMB).pdf, Manufacturer Part Number=SMBJ5339B-TP, Mounting Type="Surface Mount", Packaging="Cut Tape (CT)", Part Status=Active, Pricing 1="1=1.47, 10=1.277, 25=1.1312, 100=0.9853, 250=0.85764, 500=0.72988, 1000=0.58391 (NZD)", RoHS="RoHS Compliant", Stock 1=85990, Supplier 1=Digi-Key
D2: library part MBRS330T3G, "DIODE SCHOTTKY 30V 4A SMC", Base Part Number=MBRS330, Capacitance @ Vr, F=-, Current - Average Rectified (Io)=4A, Manufacturer="ON Semiconductor", Operating Temperature - Junction="-65°C ~ 150°C", Package / Case="DO-214AB, SMC", Supplier Device Package=SMC, Supplier Part Number 1=MBRS330T3GOSCT-ND, Category="Discrete Semiconductor Products", ComponentLink1Description=http://www.onsemi.com/pub/Collateral/MBRS340T3-D.PDF, ComponentLink1URL=http://www.onsemi.com/pub/Collateral/MBRS340T3-D.PDF, Diode Type=Schottky, Manufacturer Part Number=MBRS330T3G, Mounting Type="Surface Mount", Packaging="Cut Tape (CT)", Part Status=Active, Pricing 1="1=0.93, 10=0.79, 100=0.5902, 500=0.46368, 1000=0.35829 (NZD)", RoHS="RoHS Compliant", Speed="Fast Recovery =< 500ns, > 200mA (Io)", Stock 1=8919, Supplier 1=Digi-Key
DL1: library part DL_150060BS75000, "LED Blue 270mcd 0603 SMD", Forward Current If=30, Forward Voltage=3.2, Manufacturer="WURTH ELEKTRONIK", Manufacturer Part Number=150060BS75000, Supplier Part Number 1=2322069, LED Colour=Blue, Luminous Intensity=270, Pricing="1=0.3844, 50=0.3252, 100=0.2957, 500=0.2365 (NZD)", Storage Location="PCB Assembly WS", Supplier="ECE Dept", Supplier 1=Farnell, Viewing Angle=120°, Wavelength Typ=470
DL2: library part DL_150060GS75000, "LED Dk Green 430mcd 0603 SMD", Forward Current If=30, Forward Voltage=3.2, Manufacturer="WURTH ELEKTRONIK", Manufacturer Part Number=150060GS75000, Supplier Part Number 1=2322070, LED Colour="Dark Green", LED Mounting=SMD, Lens Shape=Rectangular, Luminous Intensity=430, Storage Location="PCB Assembly WS", Supplier="ECE Dept", Supplier 1=Farnell, Viewing Angle=140°, Wavelength Typ=520
F1: library part FS_Fuse_5.0A, "Fuse 5.0A Fast Acting 1206 SMD", Case/Package=1206, Case Code (Metric)=3216, DC Cold Resistance=19mR, Manufacturer="Bel TRP", Manufacturer Part Number=C1F5, Max Operating Temperature=125°C, Min Operating Temperature=-55°C, Supplier Part Number 1=507-1886-1-ND, Voltage Rating=125V, Voltage Rating (DC)=63V, Approvals=CE,cURus, Case Code (Imperial)=1206, ComponentLink1Description=http://www.farnell.com/datasheets/2571625.pdf, ComponentLink1URL=http://www.farnell.com/datasheets/2571625.pdf, ComponentLink2Description=http://belfuse.com/pdfs/C1F.pdf, ComponentLink2URL=http://belfuse.com/pdfs/C1F.pdf, ComponentLink3Description=http://www.mouser.com/ds/2/643/C1F-594910.pdf, ComponentLink3URL=http://www.mouser.com/ds/2/643/C1F-594910.pdf, ComponentLink4Description=https://belfuse.com/resources/StewartConnector/C1F.pdf, ComponentLink4URL=https://belfuse.com/resources/StewartConnector/C1F.pdf, Contact Plating=Nickel,Tin, Current Rating=5A, Fuse Type="Board Mount (Cartridge Style Excluded)", Length=0.126inch, Mount="Surface Mount", Number of Pins=2, Packaging="Tape and Reel", Pricing 1="1=0.32, 5=0.312, 10=0.298, 50=0.2662, 100=0.2479, 250=0.22032, 500=0.1836, 1000=0.17442 (USD)", Stock 1=725, Supplier 1=Digi-Key, Supplier 2=Element14, Supplier Part Number 2=2848595, Voltage Rating (AC)=125V, Width=0.062inch
F2: library part FS_Fuse_2.0A, "Fuse 2.0A Very Fast Acting 1206 SMD", Manufacturer=MULTICOMP, Manufacturer Part Number="MC12CF 002", Supplier Part Number 1=1841029, Manufacturer PN="MC12CF 002", Storage Location="PCB Assembly WS", Supplier="ECE Dept", Supplier 1=Farnell
H1: library part JA_MOLEX_KK_10POS, "CONN HEADER 10POS 2.54mm VERT_ Thru Hole", Supplier Part Number 1=1756828, Storage Location="ECE Dept Store", Supplier="ECE Dept", Supplier 1=Farnell
H2 H3: library part JA_MOLEX_KK_2POS, "CONN HEADER 2POS 2.54mm VERT_Thru Hole", Supplier Part Number 1=1462926, Storage Location="ECE Dept Store", Supplier="ECE Dept", Supplier 1=Farnell
H4: library part JA_MOLEX_KK_3POS, "CONN HEADER 3POS 2.54mm VERT_Thru Hole", Manufacturer=Molex, Manufacturer PN=22-23-2031, Supplier Part Number 1=9731156, Storage Location="ECE Dept Store", Supplier="ECE Dept", Supplier 1=Farnell
H5: "3Pin Header 2.54mm spacing"
H6: library part JS_USB_MICRO_B_SMT, "CONN USB MICRO B RECPT SMT R/A", Manufacturer=FCI, Manufacturer Part Number=10118194-0001LF, Supplier Part Number 1=609-4618-1-ND, Features="Shielded, Solder Retention", Gender=Receptacle, Mounting Type="Surface Mount, Right Angle, Horizontal", Number of Contacts=5, Specifications="USB 2.0", Supplier 1=Digi-Key
H7 H8: library part JA_MOLEX_KK_4POS, "CONN HEADER 4POS 2.54mm VERT_Thru Hole", Manufacturer=Molex, Manufacturer PN=22-23-2041, Supplier Part Number 1=9731164, Storage Location="ECE Dept Store", Supplier="ECE Dept", Supplier 1=Farnell
H9: library part JA_HDR_IDC_5X2_VERT, "IDC Header, 2,54mm, 10-Pin, Vert", Supplier Part Number 1=1096985, Storage Location="ECE Dept Store", Supplier="ECE Dept", Supplier 1=Farnell
J1: library part TP_JUMPER_CO, "2.54mm Jumper change over, Thru Hole", Storage Location="ECE$ Store", Supplier="ECE Dept"
L1 L3: library part IN_Ferrite-Bead, "Ferrite Bead, Rdc 0.3R, Z100MHZ 600R, Imax 1A, SMD 1206", DC Current Rating=1, DC Resistance Max=0.08, Ferrite Case Style="1206 ^3216 Metric]", Frequency Range="50MHz to 1", Impedance Tolerance="± 25%", Manufacturer=FAIR-RITE, Manufacturer Part Number=2512066017Y1, Supplier Part Number 1=1612060, Ferrite Mounting=SMD, Impedance=600, Manufacturer PN=2512066017Y1, Storage Location="PCB Assembly WS", Supplier="ECE Dept", Supplier 1=Farnell
L2: library part CDRH104RNP-5R2NC, "FIXED IND 5.2UH 6A 22 MOHM SMD", Current - Saturation=5.6A, DC Resistance (DCR)="22 mOhm Max", Frequency - Self Resonant=-, Manufacturer="Sumida America Components Inc.", Operating Temperature="-40°C ~ 100°C", Package / Case=Nonstandard, Supplier Part Number 1=308-2280-1-ND, Tolerance=±30%, Category="Inductors, Coils, Chokes", ComponentLink1Description=http://products.sumida.com/products/pdf/CDRH104R.pdf, ComponentLink1URL=http://products.sumida.com/products/pdf/CDRH104R.pdf, Height - Seated (Max)="0.157\" (4.00mm)", Manufacturer Part Number=CDRH104RNP-5R2NC, Material - Core=Ferrite, Mounting Type="Surface Mount", Packaging="Cut Tape (CT)", Part Status=Active, Pricing 1="1=2.9, 10=2.678, 100=1.8743, 500=1.5173 (NZD)", Q @ Freq=-, Ratings=-, RoHS="RoHS Compliant", Shielding=Shielded, Size / Dimension="0.402\" L x 0.394\" W (10.20mm x 10.00mm)", Stock 1=3849, Supplier 1=Digi-Key, Supplier Device Package=-, Type=-
Q1 Q2: library part TM_SSM3J328R, "MOSFET P-CH 20V 6A SOT23-3", Case/Package=SOT-23-3, Continuous Drain Current (ID)=6A, Drain to Source Breakdown Voltage=-20V, Drain to Source Resistance=47.4mR, Drain to Source Voltage (Vdss)=20V, Gate to Source Voltage (Vgs)=8V, Input Capacitance=840pF, Input Capacitance (Ciss) @ Vds="840pF @ 10V", Manufacturer=Toshiba, Max Operating Temperature=150°C, Max Power Dissipation=1W, Min Operating Temperature=-55°C, Package / Case="SOT-23-3 Flat Leads", Package Quantity=3000, Power Dissipation=2W, Supplier Device Package=SOT-23F, Supplier Part Number=SSM3J328RLFDKR-ND, ComponentLink1Description=https://datasheet.ciiva.com/11158/ssm3j328r-datasheet-en-20140301-11158652.pdf, ComponentLink1URL=https://datasheet.ciiva.com/11158/ssm3j328r-datasheet-en-20140301-11158652.pdf, Current - Continuous Drain (Id) @ 25° C=6A, Element Configuration=Single, FET Feature="Logic Level Gate, 1.5V Drive", FET Type="MOSFET P-Channel, Metal Oxide", Gate Charge (Qg) @ Vgs="12.8nC @ 4.5V", Manufacturer Part Number=SSM3J328R,LF, Mount="Surface Mount", Number of Channels=1, Number of Elements=1, Number of Pins=3, Packaging="Tape and Reel", Power - Max=1W, Pricing="1=0.79, 10=0.658, 25=0.5772, 100=0.4939, 250=0.42836, 500=0.36284, 1000=0.27972 (NZD)", Radiation Hardening=No, Rds On Max=29.8mR, Storage Location="PCB Assembly WS", Supplier=Digi-Key, Supplier 1=Digi-Key, Supplier Part Number 1=SSM3J328RLFDKR-ND, Turn-Off Delay Time=107ns, Turn-On Delay Time=32ns, Vgs(th) (Max) @ Id="1V @ 1mA"
R1 R2 R3 R5 R6 R13 R16 R17: library part RS_0R0, "RES 0.0 OHM 1/10W 5% 0603 SMD", Storage Location="PCB Assembly WS", Supplier="ECE Dept"
R4: library part RS_1K, "RES 1.0K OHM 1/10W 5% 0603 SMD", Storage Location="PCB Assembly WS", Supplier="ECE Dept"
R7 R8: library part RS_270R, "RES 270 OHM 1/10W 5% 0603 SMD", Storage Location="PCB Assembly WS", Supplier="ECE Dept"
R9: library part RS_15K, "RES 15.0K OHM 1/10W 5% 0603 SMD", Storage Location="PCB Assembly WS", Supplier="ECE Dept"
R10 R14: library part RS_47K, "RES 47.0K OHM 1/10W 5% 0603 SMD", Storage Location="PCB Assembly WS", Supplier="ECE Dept"
R11: library part RS_27K, "RES 27K OHM 1/10W 5% 0603 SMD", Storage Location="PCB Assembly WS", Supplier="ECE Dept"
R12: library part RS_36K, "RES 36K OHM 1/10W 5% 0603 SMD", Storage Location="PCB Assembly WS", Supplier="ECE Dept"
R15: library part RS_24K, "RES 24K OHM 1/10W 5% 0603 SMD", Storage Location="PCB Assembly WS", Supplier="ECE Dept"
R18 R19: library part RS_10K, "RES 10.0K OHM 1/10W 5% 0603 SMD", Storage Location="PCB Assembly WS", Supplier="ECE Dept"
R20 R21: library part RS_27R, "RES 27 OHM 1/10W 5% 0603 SMD", Storage Location="PCB Assembly WS", Supplier="ECE Dept"
R22 R23: library part RS_2K, "RES 2K OHM 1/10W 5% 0603 SMD", Storage Location="PCB Assembly WS", Supplier="ECE Dept"
R24: library part RT_1R, "RES 1R OHM 1/4W 5% 1206 SMD", Storage Location="PCB Assembly WS", Supplier="ECE Dept"
R25 R26: library part RS_360R, "RES 360 OHM 1/10W 5% 0603 SMD", Storage Location="PCB Assembly WS", Supplier="ECE Dept"
S1: "DIP Switch, 4 Position, SPST SMD", Contact Current DC Max=25, Manufacturer="OMRON ELECTRONIC COMPONENTS", Manufacturer Part Number=A6SN-4101, Supplier Part Number 1=2029425, Contact Configuration=SPST, External Length / Height=12.1, No. of Switch Positions=4, Pitch Spacing=2.54, Storage Location="PCB Assembly WS", Supplier="ECE Dept", Supplier 1=Farnell
S2 S3: library part WS_EVQPNF05M, "Panasonic 6 x 3.5mm SMD Light Touch Switch Type SMD", Manufacturer=Panasonic, Manufacturer PN=EVQPNF05M, Supplier Part Number 1=2079481, PackageDescription="6.0 x 3.5 mm", Storage Location="PCB Assembly WS", Supplier="ECE Dept", Supplier 1=Farnell, Supplier 2=Digi-Key, Supplier Part Number 2=P13598SCT-ND
T1: library part TM_BSH105, "MOSFET N-CH 20V 1.05A SOT-23", Current - Continuous Drain (Id) @ 25° C=1.05A, Drain to Source Voltage (Vdss)=20V, Input Capacitance (Ciss) @ Vds="152pF @ 16V", Manufacturer="NXP Semiconductors", Package / Case="TO-236-3, SC-59, SOT-23-3", Power - Max=417mW, Supplier Part Number 1=1758066, FET Type="MOSFET N-Channel, Metal Oxide", Gate Charge (Qg) @ Vgs="3.9nC @ 4.5V", Manufacturer Part Number=BSH105,215, Pricing="1=0.53, 10=0.42, 25=0.3544, 100=0.2885, 250=0.23896, 500=0.1974, 1000=0.14785 (NZD)", Rds On (Max) @ Id, Vgs="200 mOhm @ 600mA, 4.5V", Storage Location="PCB Assembly WS", Supplier="ECE Dept", Supplier 1=Farnell, Supplier 2=Digi-Key, Supplier Part Number 2=568-6215-1-ND
TP1 TP2 TP3 TP4 TP5 TP7 TP12 TP13 TP14 TP15 TP16 TP17 TP18 TP19 TP20 TP21 TP22 TP23 TP24 TP25 TP26 TP27 TP28 TP29 TP30 TP31 TP32: library part TP_0603, "Test Point 1.65X0.9X1.2mm SMD", Manufacturer="TE Connectivity AMP Connectors", Manufacturer Part Number=1625854-3, Supplier Part Number 1=A106145CT-ND, Mounting Type="Surface Mount", Supplier 1=Digi-Key, Terminal="0.063\" x 0.031\" x 0.045\" (1.60mm x 0.80mm x 1.15mm)", Type="PC Test Point"
TP6: "Test Point 1.65X0.9X1.2mm SMD", Manufacturer="TE Connectivity AMP Connectors", Manufacturer Part Number=1625854-3, Supplier Part Number 1=A106145CT-ND, Mounting Type="Surface Mount", Supplier 1=Digi-Key, Terminal="0.063\" x 0.031\" x 0.045\" (1.60mm x 0.80mm x 1.15mm)", Type="PC Test Point"
TP8 TP9 TP10 TP11: library part TP_1206, "Test-Point 3.3x1.6x2.1mm SMD", Manufacturer="Harwin Inc", Manufacturer Part Number=S1751-46R, Supplier Part Number 1=952-1478-2-ND, Mounting Type="Surface Mount", Storage Location=ProtoPlace, Supplier="ECE Dept", Supplier 1=Digi-Key, Supplier 2=Farnell, Supplier Part Number 2=1826282, Type="PC Test Point"
U1: library part MPU-9250, "9 axis IMU"
U2: library part NRF24, "nRF24 SMD Module", Warning="No power planes near or under device"
U3: "Dual H-Bridge Motor Driver 1.5A"
U4 U7 U8: "1.8V - 5V level converter"
U5: library part ADP2302ARDZ-5.0-R7, "IC REG BUCK 5V 2A 8SOIC", Current - Output=2A, Frequency - Switching=700kHz, Supplier Part Number 1=ADP2302ARDZ-5.0-R7CT-ND, Voltage - Input (Max)=20V, Voltage - Output (Min/Fixed)=5V, Manufacturer_Part_Number=ADP2302ARDZ-5.0-R7, Output Type=Fixed, Supplier 1=Digi-Key, Type=DEV, Vendor="Analog Devices Inc"
U6 U9: library part SV_CAT6219-330TDGT3, "IC REG LIN 3.3V 500MA TSOT23-5", Base Part Number=CAT6219, Current - Output=500mA, Package / Case="SOT-23-5 Thin, TSOT-23-5", Supplier Device Package=TSOT-23-5, Supplier Part Number=CAT6219-330TDGT3CT-ND, Voltage - Input (Max)=5.5V, Voltage - Output (Min/Fixed)=3.3V, Voltage Dropout (Max)="0.5V @ 500mA", ComponentLink1Description=http://www.onsemi.com/pub/Collateral/CAT6219-D.PDF, ComponentLink1URL=http://www.onsemi.com/pub/Collateral/CAT6219-D.PDF, Manufacturer Part Number=CAT6219-330TDGT3, Supplier=Digi-Key, Supplier 1=Digi-Key
U10: library part SE_ATSAM4S16BA-MU, "IC MCU 32BIT 512KB FLASH 64LQFP", Manufacturer=Atmel, Manufacturer Part Number=ATSAM4S8BA-ANR, Package / Case=64-LQFP, Supplier Part Number 1=ATSAM4S8BA-ANRCT-ND, Voltage - Supply (Vcc/Vdd)="1.62 V ~ 3.6 V", Code_JEDEC=MO-220VMMD-3, ComponentLink1Description="Manufacturer URL", ComponentLink1URL=http://www.atmel.com/, ComponentLink2Description="SAM4S Series Datasheet", ComponentLink2URL=http://www.atmel.com/dyn/resources/prod_documents/11100.pdf, ComponentLink3Description="SAM4S Series Summary", ComponentLink3URL=http://www.atmel.com/dyn/resources/prod_documents/11100S.pdf, Connectivity="I²C, IrDA, Memory Card, SPI, SSC, UART/USART, USB", Core Processor="ARM® Cortex®-M4", Core Size=32-Bit, Data Converters="A/D 11x12b, D/A 2x12b", Number of I/O=47, PackageDescription="64-Pin Quad Flat No-Lead (QFN) Sawn, 9 x 9 x 1.0 mm Body, 0.5 mm Pitch, Exposed Pad", PackageReference=64PS, PackageVersion="revJ, Jul-2007", Packaging="Cut Tape (CT)", Peripherals="Brown-out Detect/Reset, DMA, POR, PWM, WDT", Program Memory Size="512KB (512K x 8)", Program Memory Type=FLASH, RAM Size="128K x 8", Speed=120MHz, Supplier 1=Digi-Key
VR1: "JOYSTICK 10K OHM 2 AXIS TH", Manufacturer 1=SparkFun, Manufacturer Part Number 1=COM-09032, Supplier Part Number 1=1568-1526-ND, ComponentLink1Description=https://media.digikey.com/pdf/Data%20Sheets/Sparkfun%20PDFs/COM-09032_Web.pdf?src-supplier=Digi-Key, ComponentLink1URL=https://media.digikey.com/pdf/Data%20Sheets/Sparkfun%20PDFs/COM-09032_Web.pdf?src-supplier=Digi-Key, Pricing 1="1=3.95000 (USD)", RoHS=No, Stock 1=563, Supplier 1=Digi-Key
Y1: library part XT_CRYSTAL_12MHz_18pF, "CRYSTAL 12MHZ 18PF 6X3.5mm SMD", ESR (Equivalent Series Resistance)="60 Ohm", Frequency Stability=±50ppm, Frequency Tolerance=±30ppm, Load Capacitance=18pF, Manufacturer="CTS-Frequency Controls", Manufacturer Part Number=406C35D12M00000, Operating Mode=Fundamental, Operating Temperature="-20°C ~ 70°C", Package / Case="4-SMD, No Lead (DFN, LCC)", Supplier Part Number 1=CTX855CT-ND, Frequency=12MHz, Height="0.047\" (1.20mm)", Mounting Type="Surface Mount", Size / Dimension="0.236\" L x 0.138\" W (6.00mm x 3.50mm)", Supplier 1=Digi-Key

## Via types
v1: diameter 1, hole 0.7, Top Side to Bottom Side, 32 vias
v2: diameter 1, hole 0.5, Top Side to Bottom Side, 25 vias
v3: diameter 0.75, hole 0.5, Top Side to Bottom Side, 18 vias
v4: diameter 1.25, hole 0.7, Top Side to Bottom Side, 13 vias
v5: diameter 0.8, hole 0.5, Top Side to Bottom Side, 9 vias
v6: diameter 1.5, hole 1, Top Side to Bottom Side, 5 vias
v7: diameter 2, hole 1.5, Top Side to Bottom Side, 5 vias
v8: diameter 0.7, hole 0.5, Top Side to Bottom Side, 4 vias
v9: diameter 2.3, hole 2.1, Top Side to Bottom Side, 4 vias
v10: diameter 1.27, hole 0.7, Top Side to Bottom Side, 3 vias
v11: diameter 1.27, hole 0.711, Top Side to Bottom Side, 2 vias
v12: diameter 2.2, hole 1.6, Top Side to Bottom Side, 1 vias
v13: diameter 1.3, hole 1.1, Top Side to Bottom Side, 1 vias